# Altium PCB Copy of Main_Board.PcbDoc (part 2 of 4)
Units mil, origin at the board's own origin, x right, y up, seen from the top; angles counter-clockwise.
Board outline 5818.45 x 4760.12 mil, 4 copper layers (Top Layer, POWER, GROUND, Bottom Layer), stack 30.634 mil thick; 298 components, 323 nets, 1386 pads, 599 vias.
Unrouted connection lines stored in the file: 1.
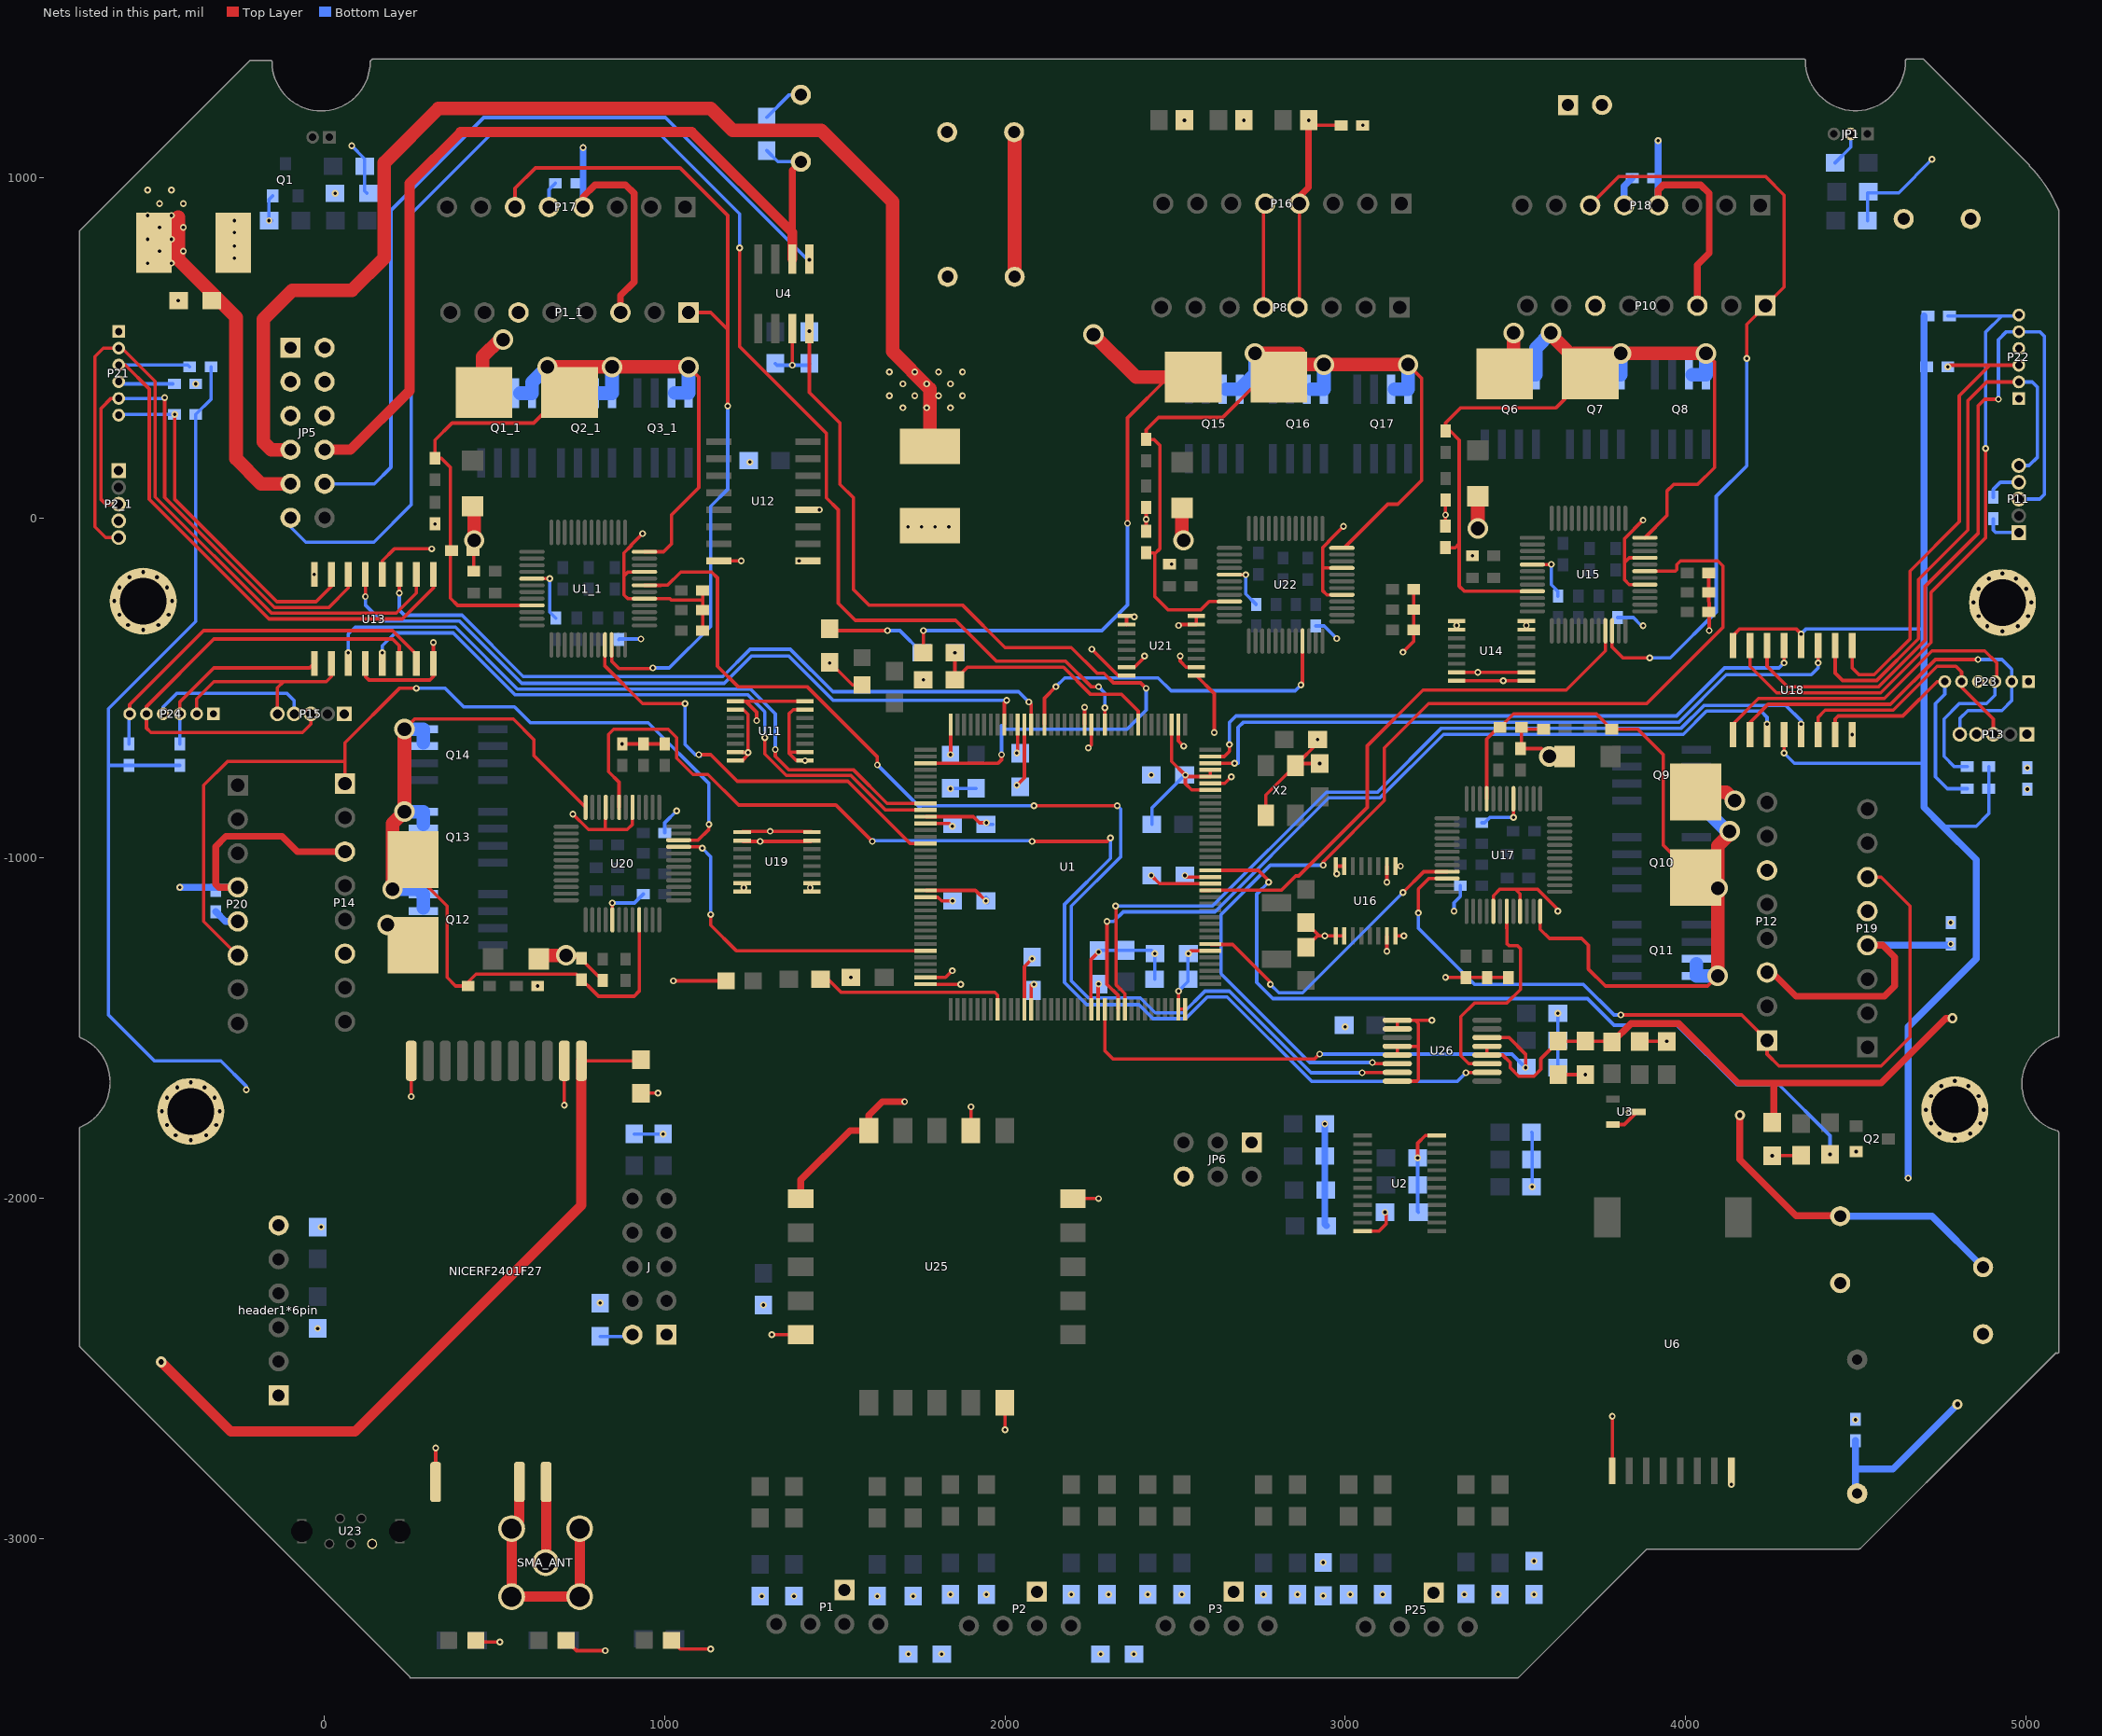
[diagram p4: the nets of this part, all layers, seen from the top]

## Via types
v1: diameter 20, hole 10, Top Layer to Bottom Layer, 507 vias
v2: diameter 25, hole 12, Top Layer to Bottom Layer, 48 vias
v3: diameter 60, hole 40, Top Layer to Bottom Layer, 40 vias
v4: diameter 30, hole 16, Top Layer to Bottom Layer, 3 vias
v5: diameter 32, hole 16, Top Layer to Bottom Layer, 1 vias

## Nets (pads, with @x,y where several pads share a name; then routed paths per layer and width w, separated by ;. In a path a pad name is that pad's centre, name@x,y a point inside that pad or via, vN(x,y) a via of type N, cw(c..) or ccw(c..) an arc to the next point about the centre after c; other vN are vias at no path point) (continued)
+3.3V: C9.2 C10.2 C41.1 C42.1 C43.1 C44.1 C45.1 C54.1 C55.1 C66.1 C67.1 C78.1 C79.1 C85.1 C91.1 C99.2 C103.1 C104.1 DS1.1 DS2.1 DS3.1 DS4.1 DS5.1 header1*6pin.1 J.2 JP5.7 JP6.1 R11.2 R12.2 R13.2 R14.2 R15.2 R16.2 R17.2 R18.2 R19.2 R20.2 R21.2 R22.2 R23.1 R24.1 R35.2 R40.2 R41.2 R42.2 R48.2 R49.2 R50.2 R51.2 R91.2 R92.1 R93.1 R98.1 R103.2 R104.2 R105.2 R106.2 R111.1 R112.1 R113.1 R114.1 R115.1 R116.1 R117.1 R118.1 R119.2 R120.2 R121.2 R122.2 R123.2 U1.6 U1.17 U1.30 U1.32 U1.33 U1.39 U1.52 U1.62 U1.72 U1.84 U1.95 U1.108 U1.121 U1.131 U1.143 U1.144 U2.24 U6.1 U11.1 U11.16 U12.4 U12.16 U13.4 U13.12 U13.16 U14.1 U14.16 U16.1 U16.16 U18.4 U18.12 U18.16 U19.1 U19.16 U21.1 U21.16 U25.1 U25.20 | length 15898.9
  Top Layer w10: U13.12@119.99,-428.38 119.99,-466.38 130.49,-476.88 309.49,-476.88 319.99,-466.38 U13.16@319.99,-444.38 ; U13.4@169.99,-166.38 169.99,-126.38 204.99,-91.38 v1(314.99,-91.38) ; U13.16@319.99,-428.38 v1(319.99,-366.38) ; DS3.1@444.99,-3300.08 449.99,-3305.08 v1(514.99,-3305.08) ; DS2.1@709.99,-3300.08 739.99,-3330.08 v1(824.99,-3330.08) ; DS5.1@1019.99,-3300.08 1044.99,-3325.08 v1(1134.99,-3325.08) ; v1(1024.99,-1361.38) DS4.1@1179.99,-1361.38 ; U12.16@1158.99,-126.38 v1(1224.99,-126.38) ; U11.1@1207.49,-538.88 1237.49,-538.88 ; U19.1@1227.49,-923.88 1229.99,-921.38 v1(1309.99,-921.38) 1429.99,-921.38 U19.16@1432.49,-923.88 ; v1(1269.99,-596.38) 1269.99,-571.38 1237.49,-538.88 ; U11.16@1412.49,-538.88 1237.49,-538.88 ; C79.1@1484.99,-424.38 1551.99,-491.38 DS1.1@1579.99,-491.38 ; U1.108@1766.68,-1370.87 1767.2,-1371.38 v1(1869.99,-1371.38) ; U1.95@1766.68,-1114.96 1802.36,-1114.96 1813.77,-1126.38 v1(1845.99,-1126.38) ; U1.84@1766.68,-898.43 1837.13,-898.43 v1(1845.09,-906.38) ; v1(1839.99,-696.38) 1840.5,-695.87 U1.72@1840.5,-608.08 ; v1(2034.99,-691.38) 2037.35,-689.02 U1.62@2037.35,-608.08 ; U1.121@2076.72,-1444.69 2076.72,-1373.65 2078.99,-1371.38 v1(2084.99,-1371.38) ; U1.52@2234.2,-608.08 v1(2234.2,-557.17) ; v1(2254.99,-386.38) 2332.49,-463.88 U21.16@2357.49,-463.88 ; U1.131@2273.57,-1444.69 2273.57,-1371.8 v1(2274.99,-1370.38) ; U1.39@2490.11,-608.08 2490.11,-681.26 2489.99,-681.38 2489.99,-716.38 v1(2529.99,-756.38) ; U1.143@2509.8,-1444.69 U1.144@2529.48,-1444.69 ; U1.143@2509.99,-1434.33 v1(2509.99,-1391.38) ; v1(2528.99,-1051.38) 2533.52,-1055.91 U1.17@2603.3,-1055.91 ; v1(2538.99,-1281.38) 2547.93,-1272.45 U1.6@2603.3,-1272.45 ; U21.1@2562.49,-463.88 2614.99,-516.38 v1(2614.99,-631.38) ; U1.30@2603.3,-800 2548.61,-800 2529.99,-781.38 v1(2529.99,-756.38) ; U1.33@2603.3,-740.95 U1.32@2603.3,-760.63 2534.24,-760.63 v1(2529.99,-756.38) ; U16.16@3147.49,-1228.88 v1(3172.49,-1228.88) ; U16.1@3147.49,-1023.88 v1(3162.49,-1023.88) ; v1(3212.99,-1881.38) 3212.99,-1838.38 3235.74,-1815.63 U2.24@3268.99,-1815.63 ; U14.16@3327.49,-478.88 v1(3464.99,-478.88) U14.1@3532.49,-478.88 ; U6.1@3784.99,-2801.38 v1(3784.99,-2641.38) ; U18.16@4139.99,-375.38 4139.99,-346.38 4159.99,-326.38 4324.99,-326.38 v1(4339.99,-341.38) ; v1(4289.99,-691.38) U18.4@4289.99,-637.38
  Top Layer w20: U25.1@1399.99,-2001.38 1399.99,-1946.38 1544.99,-1801.38 U25.20@1599.99,-1801.38 1599.99,-1756.38 1639.99,-1716.38 v1(1704.99,-1716.38)
  Top Layer w40: JP5.7@-100,200 -156.39,200 -180.01,223.62 -180.01,583.62 -95.01,668.62 79.99,668.62 174.99,763.62 174.99,1043.62 334.99,1203.62 1134.99,1203.62 1199.99,1138.62 1459.99,1138.62 1669.99,928.62 1669.99,488.62 1779.99,378.62 C103.1@1779.99,209.76
  Bottom Layer w10: R111.1@-425.01,-727.88 R112.1@-575.01,-727.88 -631.51,-727.88 -635.01,-731.38 ; R113.1@-333.51,443.62 -333.51,348.62 R114.1@-378.51,303.62 -378.51,-304.88 -635.01,-561.38 -635.01,-731.38 ; v1(-230.01,-1681.38) -230.01,-1671.38 -305.01,-1596.38 -500.01,-1596.38 -635.01,-1461.38 -635.01,-731.38 ; C10.2@809.99,-2406.38 899.99,-2406.38 J.2@904.99,-2401.38 J.2@905.99,-2402.38 ; R91.2@909.99,-1811.38 v1(994.99,-1811.38) ; R35.2@2431.99,-901.38 2431.99,-852.38 C78.1@2527.99,-756.38 ; v1(2509.99,-1391.38) 2537.99,-1363.38 C55.1@2537.99,-1356.38 2537.99,-1282.38 v1(2538.99,-1281.38) ; v1(3212.99,-1881.38) R24.1@3212.99,-1961.38 3212.99,-2039.38 C9.2@3214.99,-2041.38 ; R40.2@3547.99,-1806.38 3549.99,-1808.38 v1(3549.99,-1966.38) ; R50.2@3624.99,-1616.38 R48.2@3624.99,-1536.38 v1(3624.99,-1456.38) ; v1(4289.99,-691.38) 4319.99,-721.38 4701.49,-721.38 ; v1(4339.99,-341.38) 4354.99,-326.38 4696.49,-326.38 4701.49,-331.38 ; 4756.49,-906.38 4854.99,-906.38 4891.49,-869.88 R118.1@4891.49,-796.38 R117.1@4891.49,-731.38
  Bottom Layer w20: v1(2939.99,-1781.38) R120.2@2939.99,-1876.38 2939.99,-2076.38 R123.2@2944.99,-2081.38 ; v1(4654.99,-1941.38) 4654.99,-1496.38 4854.99,-1296.38 4854.99,-1004.88 4756.49,-906.38 4701.49,-851.38 4701.49,-721.38 4701.49,-331.38 R116.1@4701.49,593.62
  other v1: 1813.99,-3340.08 2378.99,-3340.08 1284.99,-3170.08 1379.99,-3170.08 1624.99,-3170.08 1729.99,-3170.08 2934.99,-3169.08 1839.99,-3165.08 1944.99,-3165.08 2194.99,-3165.08 2304.99,-3165.08 2419.99,-3165.08 2519.99,-3165.08 2759.99,-3165.08 2859.99,-3165.08 3014.99,-3165.08 3109.99,-3165.08 3349.99,-3165.08 3449.99,-3165.08 3554.99,-3165.08 1289.99,-2314.38 -10,-2085 2999.99,-1496.38 1484.99,-426.38 1454.99,23.62 1249.99,163.62 1699.99,323.62 1769.99,323.62 1839.99,323.62 1659.99,358.62 1734.99,358.62 1804.99,358.62 1874.99,358.62 1699.99,393.62 1769.99,393.62 1839.99,393.62 1659.99,428.62 1734.99,428.62 1804.99,428.62 1874.99,428.62
+5V: C2.2 C3.2 C8.1 C11_1.2 C12_1.2 C17.2 C18.2 C56.2 C57.2 C68.2 C69.2 C80.2 C81.2 C93.2 C110.1 C111.1 J10.1 JP5.9 LS1.1 NICERF2401F27.1 P1_1.3 P2_1.4 P8.4 P10.3 P11.4 P12.3 P13.4 P14.3 P15.4 P16.4 P17.4 P18.4 P19.4 P20.4 P21.4 P22.4 P23.4 P24.4 R1.1 R4.2 R5.2 R43.2 R86.1 R87.1 R88.1 U26.12 U26.13 | length 10453.8
  Top Layer w10: NICERF2401F27.1@754.99,-1596.38 926.99,-1596.38 C8.1@929.99,-1593.38 ; P8.4@2859.99,618.62 2864.99,623.62 P16.4@2864.99,923.62 P16.4@2864.99,943.62 ; v1(2892.39,1168.62) 2907.39,1153.62 C56.2@2988.49,1153.62 ; U26.13@3416.88,-1553.59 U26.12@3416.88,-1579.18 3462.79,-1579.18 3484.99,-1601.38 3484.99,-1616.38 3509.99,-1641.38 3554.99,-1641.38 3574.99,-1621.38 3574.99,-1590.5 C17.2@3626.79,-1538.7 C18.2@3706.29,-1538.7 3781.61,-1538.7 R43.2@3784.3,-1541.38
  Top Layer w20: P20.4@-255.01,-1086.38 -310.01,-1086.38 -320.01,-1076.38 -320.01,-966.38 -290.01,-936.38 -125.01,-936.38 -80.01,-981.38 P14.3@59.99,-981.38 ; P17.4@759.99,913.62 759.99,943.62 794.99,978.62 884.99,978.62 909.99,953.62 909.99,693.62 869.99,653.62 P1_1.3@869.99,603.62 ; P16.4@2864.99,943.62 2892.39,971.02 v1(2892.39,1168.62) ; R43.2@3784.3,-1541.38 3784.99,-1541.38 3839.99,-1486.38 3979.99,-1486.38 4154.99,-1661.38 4259.99,-1661.38 ; P18.4@3919.99,918.62 3919.99,963.62 3934.99,978.62 4044.99,978.62 4069.99,953.62 4069.99,778.62 4034.99,743.62 P10.3@4034.99,623.62 ; P12.3@4239.99,-1336.38 4254.99,-1336.38 4324.99,-1406.38 4584.99,-1406.38 4614.99,-1376.38 4614.99,-1291.38 4579.99,-1256.38 P19.4@4534.99,-1256.38 ; C3.2@4259.99,-1777.38 4259.99,-1661.38 ; v4(4784.99,-1471.38) 4764.99,-1471.38 4574.99,-1661.38 4259.99,-1661.38
  Top Layer w30: v5(-480.01,-2481.38) -275.01,-2686.38 89.99,-2686.38 754.99,-2021.38 NICERF2401F27.1@754.99,-1596.38
  Top Layer w40: -430.01,883.62 -430.01,758.62 -260.01,588.62 -260.01,173.62 -186.39,100 JP5.9@-100,100
  Bottom Layer w10: P21.4@-605.01,400.19 -598.43,393.62 C68.2@-446.51,393.62 ; P24.4@-474.22,-576.38 -474.22,-555.59 -435.01,-516.38 -110.01,-516.38 -89.22,-537.17 P15.4@-89.22,-576.38 ; v1(79.99,1093.62) 117.99,1055.62 R5.2@117.99,1033.62 117.99,960.62 C2.2@124.99,953.62 ; R1.1@4534.99,873.62 4534.99,955.62 4626.99,955.62 v1(4724.99,1053.62) ; C81.2@4904.99,60.12 4904.99,83.62 4925.78,104.41 P11.4@4979.99,104.41
  Bottom Layer w20: v1(-425.01,-1086.38) P20.4@-255.01,-1086.38 ; P17.4@759.99,913.62 v1(759.99,1088.62) ; P18.4@3919.99,918.62 v1(3919.99,1108.62) ; C93.2@4499.99,-2712.88 4499.99,-2796.38 ; LS1.1@4504.99,-2868.23 4499.99,-2863.23 4499.99,-2796.38 ; P19.4@4534.99,-1256.38 4776.49,-1256.38 v1(4779.99,-1252.88) ; v4(4799.99,-2606.38) 4609.99,-2796.38 4499.99,-2796.38
  other v1: 5004.99,-797.88 -520.01,748.62 -450.01,748.62 -485.01,783.62 -415.01,783.62 -520.01,818.62 -450.01,818.62 -485.01,853.62 -415.01,853.62 -520.01,888.62 -450.01,888.62 -485.01,923.62 -415.01,923.62 -520.01,963.62 -450.01,963.62 2527.39,1168.62 2702.39,1168.62
+12V: C16.1 C112.1 JP5.8 U4.6 | length 2651
  Top Layer w20: 1374.99,838.62 1374.99,1021.77 C112.1@1399.99,1046.77
  Top Layer w30: JP5.8@0,200 76.37,200 249.99,373.62 249.99,983.62 399.99,1133.62 1079.99,1133.62 1374.99,838.62 U4.6@1374.99,760.98
  Bottom Layer w10: C16.1@1299.99,1079.62 1332.84,1046.77 C112.1@1399.99,1046.77
+16V: C38.1 C92.1 C107.1 C108.1 C109.1 F1_1.1 F3.1 F4.1 F5.1 F6.1 JP5.2 JP5.4 JP5.6 R44.2 | length 3599.7
  Top Layer w10: R44.2@1759.99,-396.38 v1(1759.99,-331.38) ; v1(2359.99,-16.38) 2359.99,293.62 F6.1@2479.99,413.62
  Top Layer w20: v4(4159.99,-1756.38) 4159.99,-1886.38 4324.99,-2051.38 C108.1@4464.99,-2051.38
  Top Layer w40: F1_1.1@474.99,393.62 464.99,403.62 464.99,473.62 514.99,523.62 v3(524.99,523.62) ; C38.1@2026.84,1133.62 2028.42,1132.04 C107.1@2028.42,708.62 ; v3(2259.99,538.62) 2384.99,413.62 2479.99,413.62 F6.1@2534.99,413.62 ; F6.1@2539.99,465.12 F6.1@2564.99,465.12 ; F3.1@3468.81,423.62 3494.99,449.8 v3(3494.99,543.62) ; F4.1@4029.99,-806.38 4119.99,-806.38 v3(4144.99,-831.38)
  Bottom Layer w10: v1(1759.99,-331.38) 2284.99,-331.38 2359.99,-256.38 v1(2359.99,-16.38)
  Bottom Layer w20: C108.1@4454.99,-2052.96 4724.99,-2052.96 C92.1@4874.99,-2202.96
  other v3: 184.99,-1196.38
+16V_1: C9_1.2 F1_1.2 LED1.1 Q1_1.7 Q1_1.8 Q2_1.7 Q2_1.8 Q3_1.7 Q3_1.8 U1_1.24 U1_1.45 | length 2632.7
  Top Layer w10: U1_1.45@609.64,-257.48 391.09,-257.48 369.99,-236.38 369.99,148.62 343.49,175.12 LED1.1@324.99,175.12 324.99,228.62 374.99,278.62 614.99,278.62 704.99,368.62 F1_1.2@719.99,368.62 ; v3@836.49,435.12 v3(844.99,443.62) ; U1_1.24@940.35,-100 996.37,-100 1019.99,-76.38 1019.99,8.62 1099.99,88.62 1099.99,413.62 v3(1069.99,443.62)
  Top Layer w40: v3(654.99,443.62) v3(844.99,443.62) v3(1069.99,443.62)
  Bottom Layer w40: 574.99,366.45 Q1_1.8@609.99,366.45 609.99,398.62 v3(654.99,443.62) ; Q2_1.7@804.99,366.45 Q2_1.8@844.99,366.45 v3@844.99,438.62 ; Q3_1.7@1029.99,366.73 Q3_1.8@1069.99,366.73 v3@1069.99,438.62
+16V_2: C53.2 F3.2 LED2.1 Q6.7 Q6.8 Q7.7 Q7.8 Q8.7 Q8.8 U15.24 U15.45 | length 2912.1
  Top Layer w10: C53.2@3294.99,-87.88 3323.49,-87.88 3334.99,-76.38 ; U15.45@3550.11,-216.07 3349.99,-216.07 3334.99,-201.07 3334.99,-76.38 ; F3.2@3674.52,483.15 3674.52,469.09 3674.52,378.15 3619.99,323.62 3339.99,323.62 3295.46,279.09 LED2.1@3295.46,255.59 3308.02,255.59 3334.99,228.62 3334.99,-76.38 ; U15.24@3880.82,-58.59 3945.46,6.06 3945.46,78.15 3965.46,98.15 4035.82,98.15 4085.46,147.79 4085.46,458.15 v3(4060.46,483.15)
  Top Layer w40: v3(3604.99,543.62) 3604.99,538.62 3674.52,469.09 F3.2@3719.99,423.62 ; F3.2@3674.52,483.15 v3(3810.46,483.15) v3(4060.46,483.15)
  Bottom Layer w40: Q6.7@3520.46,420.98 Q6.8@3560.46,420.98 3560.46,499.09 v3(3604.99,543.62) ; Q7.7@3770.46,420.98 Q7.8@3810.46,420.98 v3(3810.46,483.15) ; Q8.7@4020.46,420.98 Q8.8@4060.46,420.98 v3(4060.46,483.15)
+16V_3: C65.2 F4.2 LED3.1 Q9.7 Q9.8 Q10.7 Q10.8 Q11.7 Q11.8 U17.24 U17.45 | length 2730.8
  Top Layer w10: U17.45@3415.78,-826.03 3415.78,-650.59 3449.99,-616.38 C65.2@3454.99,-616.38 3494.99,-576.38 3737.99,-576.38 LED3.1@3782.99,-621.38 3859.99,-621.38 3934.99,-696.38 3934.99,-962.56 3997.99,-1025.56 F4.2@3997.99,-1026.38 ; U17.24@3573.26,-1156.74 3573.26,-1209.65 3599.99,-1236.38 3694.99,-1236.38 3714.99,-1256.38 3714.99,-1326.74 3764.64,-1376.38 4064.99,-1376.38 v3(4094.99,-1346.38) ; F4.2@4014.99,-1089.38 4015.49,-1088.88 v3(4094.99,-1088.88)
  Top Layer w40: v3(4094.99,-1346.38) v3(4094.99,-1088.88) 4094.99,-963.88 4137.49,-921.38 v3(4129.99,-921.38)
  Bottom Layer w40: 4032.59,-1311.38 Q11.8@4032.59,-1346.38 v3(4094.99,-1346.38) ; 4032.59,-1051.38 Q10.8@4032.59,-1088.88 v3(4094.99,-1088.88) ; Q9.7@4032.59,-791.38 Q9.8@4032.59,-831.38 4122.59,-921.38 v3(4129.99,-921.38)
+16V_4: C77.2 F5.2 LED4.1 Q12.7 Q12.8 Q13.7 Q13.8 Q14.7 Q14.8 U20.24 U20.45 | length 2721.3
  Top Layer w10: v3(234.99,-621.38) 264.99,-591.38 554.99,-591.38 614.99,-651.38 614.99,-698.67 U20.24@767.35,-851.03 ; F5.2@244.99,-1006.38 244.99,-1026.38 359.99,-1141.38 359.99,-1351.38 384.99,-1376.38 LED4.1@421.99,-1376.38 421.99,-1364.38 444.99,-1341.38 739.99,-1341.38 804.99,-1406.38 909.99,-1406.38 924.83,-1391.54 U20.45@924.83,-1181.74
  Top Layer w40: v3(199.99,-1091.38) 199.99,-898.88 v3(234.99,-863.88) v3(234.99,-621.38)
  Bottom Layer w40: v3(199.99,-1091.38) 275.27,-1091.38 Q12.8@290.27,-1106.38 Q12.7@290.27,-1146.38 ; v3(234.99,-863.88) Q13.8@290.27,-863.88 290.02,-901.38 ; v3(234.99,-621.38) Q14.8@290.27,-621.38 Q14.7@290.27,-661.38
+16V_d: C90.2 F6.2 LED5.1 Q15.7 Q15.8 Q16.7 Q16.8 Q17.7 Q17.8 U22.24 U22.45 | length 2861.9
  Top Layer w10: C90.2@2414.99,-102.88 2436.49,-102.88 2439.99,-106.38 ; U22.45@2659.64,-245.98 2600.39,-245.98 2575.49,-270.88 2479.49,-270.88 2439.99,-231.38 2439.99,-106.38 ; v3(2734.99,483.62) 2734.99,390.12 2639.99,295.12 2451.49,295.12 2414.99,258.62 LED5.1@2414.99,230.12 2438.49,230.12 2454.99,213.62 2454.99,-91.38 2439.99,-106.38 ; v3@2927.99,440.62 v3(2937.49,450.12) ; U22.24@2990.35,-87.28 2997.59,-87.28 3124.99,40.12 3154.99,40.12 3224.99,110.12 3224.99,410.12 v3(3184.99,450.12)
  Top Layer w40: v3(2734.99,483.62) 2863.99,483.62 2834.49,454.12 2838.49,450.12 v3(2937.49,450.12) v3(3184.99,450.12)
  Bottom Layer w40: Q15.7@2649.99,378.23 Q15.8@2689.99,378.23 2734.99,423.23 v3(2734.99,483.62) ; 2899.99,378.23 Q16.8@2937.49,378.23 v3(2937.49,450.12) ; Q17.7@3144.99,378.23 Q17.8@3184.99,378.23 v3(3184.99,450.12)
ADC_BATTERY: C13.2 R44.1 R45.2 U1.44 | length 727.3
  Top Layer w10: v1(1852.99,-396.38) R45.2@1852.99,-476.38 1889.99,-439.38 2172.03,-439.38 2251.77,-519.11 2342.75,-519.11 2391.68,-568.05 U1.44@2391.68,-608.08
ADC_CAP: JP5.11 U1.49 | length 4707
  Top Layer w10: v1(1219.99,793.62) 1219.99,503.62 1474.99,248.62 1474.99,58.62 1509.99,23.62 1509.99,-251.38 1559.99,-301.38 1854.99,-301.38 1974.99,-421.38 2178.08,-421.38 2253.08,-496.38 v1(2274.99,-496.38) ; U1.49@2293.26,-608.08 v1(2293.26,-558.11)
  Bottom Layer w10: JP5.11@-100,0 -100,-26.39 -55.01,-71.38 144.99,-71.38 254.99,38.62 254.99,893.62 484.99,1123.62 989.99,1123.62 1219.99,893.62 v1(1219.99,793.62) ; v1(2274.99,-496.38) 2293.26,-514.65 v1(2293.26,-558.11)
ANT: NICERF2401F27.12 SMA_ANT.1 | length 237.8
  Top Layer w30: SMA_ANT.1@649.99,-3071.38 651.45,-3069.93 NICERF2401F27.12@651.45,-2834.18
ANT_GND: NICERF2401F27.13 SMA_ANT.2 | length 746.6
  Top Layer w30: NICERF2401F27.13@572.71,-2834.18 572.71,-2948.67 SMA_ANT.2@549.99,-2971.38 SMA_ANT.2@549.99,-3171.38 SMA_ANT.2@749.99,-3171.38 SMA_ANT.2@749.99,-2971.38
BOOT_DONE: R102.1 U1.116 | length 581.3
  Top Layer w10: R102.1@1457.99,-1356.38 1479.99,-1356.38 1518.3,-1394.69 1969.99,-1394.69 1978.3,-1403 U1.116@1978.3,-1444.69
Buzzer: R6.1 U1.18 | length 2432.1
  Top Layer w10: U1.18@2603.3,-1036.22 2744.83,-1036.22 2779.99,-1071.38 v1(2774.99,-1071.38)
  Bottom Layer w10: v1(2774.99,-1071.38) 2739.99,-1106.38 2739.99,-1366.38 2786.99,-1413.38 3711.99,-1413.38 3789.99,-1491.38 3974.99,-1491.38 4149.99,-1666.38 4274.99,-1666.38 4424.99,-1816.38 v1(4424.99,-1871.38)
Chip: R47.2 U1.75 U4.4 | length 2645.4
  Top Layer w10: U4.4@1424.99,556.26 1424.99,368.62 1514.99,278.62 1514.99,98.62 1554.99,58.62 1554.99,-211.38 1599.99,-256.38 1874.99,-256.38 1999.99,-381.38 2194.99,-381.38 2270.99,-457.38 2291.15,-457.38 2318.88,-485.11 2398.72,-485.11 v1(2414.99,-501.38) ; U1.75@1766.68,-721.26 1980.11,-721.26 1989.99,-711.38 v1(1989.99,-696.38)
  Bottom Layer w10: v1(1989.99,-696.38) 1989.99,-611.38 1999.99,-621.38 2359.03,-621.38 2414.99,-565.42 v1(2414.99,-501.38)
  other v1: 1424.99,548.62
Chip_V: JP5.10 U4.5 | length 2486.4
  Bottom Layer w10: JP5.10@0,100 146.37,100 194.99,148.62 194.99,903.62 467.99,1176.62 1001.99,1176.62 1419.99,758.62 v1(1424.99,758.62)
CSOUT_1: U1_1.19 U26.7 | length 3563.1
  Top Layer w10: U1_1.19@940.35,-198.43 987.94,-198.43 ; 987.94,-198.11 1008.26,-198.11 1047,-159.37 1137.98,-159.37 1154.99,-176.38 1154.99,-436.38 1214.99,-496.38 1418.46,-496.38 1624.99,-702.91 v1(1624.99,-726.38) ; v1(2084.99,-846.38) v1(2329.99,-846.38) ; v1(3049.99,-1631.38) 3051.02,-1630.36 U26.7@3153.1,-1630.36
  Bottom Layer w10: v1(1624.99,-726.38) 1749.99,-851.38 1754.99,-846.38 v1(2084.99,-846.38) ; v1(2329.99,-846.38) 2339.99,-856.38 2339.99,-996.38 2194.99,-1141.38 2194.99,-1361.38 2244.99,-1411.38 2398.08,-1411.38 2442.08,-1455.38 2523.87,-1455.38 2587.87,-1391.38 2659.99,-1391.38 2899.99,-1631.38 v1(3049.99,-1631.38)
CSOUT_2: U15.19 U26.6 | length 3160.8
  Top Layer w10: v1(2934.99,-1021.38) 2934.99,-1011.38 3114.99,-831.38 3114.99,-676.38 3244.99,-546.38 3886.1,-546.38 4110.46,-322.02 4110.46,-141.85 4095.46,-126.85 3985.46,-126.85 3974.46,-137.85 3974.46,-152.85 3970.31,-157.01 U15.19@3880.82,-157.01 ; v1(3079.99,-1601.38) 3083.38,-1604.77 U26.6@3153.1,-1604.77
  Bottom Layer w10: v1(2934.99,-1021.38) 2779.99,-1021.38 2634.99,-1166.38 2634.99,-1340.42 2895.95,-1601.38 v1(3079.99,-1601.38)
CSOUT_3: U17.19 U26.11 | length 670.5
  Top Layer w10: U26.11@3416.88,-1604.77 3363.38,-1604.77 3339.99,-1581.38 3339.99,-1466.38 3379.99,-1426.38 3474.99,-1426.38 3514.99,-1386.38 3514.99,-1266.38 3505.99,-1257.38 3480.99,-1257.38 3475.15,-1251.54 3475.15,-1206.22 ; 3474.83,-1206.22 U17.19@3474.83,-1156.74
CSOUT_4: U20.19 U26.10 | length 3797.2
  Top Layer w10: U20.19@865.78,-851.03 865.78,-777.17 834.99,-746.38 834.99,-636.38 849.99,-621.38 1009.99,-621.38 1034.99,-646.38 1034.99,-706.38 1082.99,-754.38 1127.03,-754.38 1217.03,-844.38 1502.99,-844.38 v1(1609.99,-951.38) ; v1(2079.99,-951.38) 2299.99,-951.38 v1(2309.99,-941.38) ; v1(3354.99,-1631.38) 3356.02,-1630.36 U26.10@3416.88,-1630.36
  Bottom Layer w10: v1(1609.99,-951.38) v1@1611.99,-949.38 ; v1@1614.99,-946.38 v1@1611.99,-949.38 ; v1(2079.99,-951.38) 2077.99,-949.38 v1@1611.99,-949.38 ; v1(2309.99,-941.38) 2309.99,-1001.38 2174.99,-1136.38 2174.99,-1366.38 2239.99,-1431.38 2394.03,-1431.38 2435.03,-1472.38 2530.91,-1472.38 2594.91,-1408.38 2652.95,-1408.38 2900.95,-1656.38 3329.99,-1656.38 v1(3354.99,-1631.38)
CURRENT_DRDY: R50.1 U1.132 U26.14 | length 1564.8
  Top Layer w10: U1.132@2293.26,-1444.69 2293.26,-1566.57 2318.08,-1591.38 2602.27,-1591.38 2602.48,-1591.17 2910.2,-1591.17 v1(2924.99,-1576.38) ; U26.14@3416.88,-1528 3481.61,-1528 3529.99,-1576.38 v1(3529.99,-1616.38)
  Bottom Layer w10: v1(2924.99,-1576.38) 3489.99,-1576.38 v1(3529.99,-1616.38)
DIR_1: U1.87 U1_1.9 | length 1297.3
  Top Layer w10: U1_1.9@824.2,-373.63 824.2,-435.59 934.99,-546.38 v1(1059.99,-546.38) ; v1(1099.99,-696.38) 1134.99,-696.38 1212.99,-774.38 1537.99,-774.38 1721.09,-957.48 U1.87@1766.68,-957.48
  Bottom Layer w10: v1(1059.99,-546.38) 1059.99,-666.38 1089.99,-696.38 v1(1099.99,-696.38) v1@1104.49,-700.88
DIR_2: U1.15 U15.9 | length 1642.9
  Top Layer w10: U1.15@2578.3,-1095.28 U1.15@2603.3,-1095.28 2604.38,-1094.19 2813.06,-1094.19 2854.43,-1052.82 2863.55,-1052.82 3064.99,-851.38 3064.99,-670.42 3229.03,-506.38 3649.36,-506.38 3764.68,-391.07 U15.9@3764.68,-332.21
DIR_3: U1.7 U17.9 | length 907
  Top Layer w10: U1.7@2603.3,-1252.76 2605.08,-1254.54 2669.6,-1254.54 2779.99,-1364.93 v1(2779.99,-1371.38) ; v1(3169.99,-1101.38) 3230.78,-1040.59 U17.9@3299.64,-1040.59
  Bottom Layer w10: v1(2779.99,-1371.38) 2804.99,-1396.38 2874.99,-1396.38 v1(3169.99,-1101.38)
DIR_4: U1.103 U20.9 | length 969.9
  Top Layer w10: U20.9@1040.98,-967.17 1105.78,-967.17 v1(1109.99,-971.38) ; v1(1134.99,-1166.38) 1134.99,-1197.45 1209.99,-1272.45 U1.103@1766.68,-1272.45
  Bottom Layer w10: v1(1109.99,-971.38) 1134.99,-996.38 v1(1134.99,-1166.38)
DIR_d: U1.58 U22.9 | length 1010.3
  Top Layer w10: U1.58@2116.09,-608.08 2116.09,-530.28 v1(2149.99,-496.38) ; v1(2869.99,-491.38) 2874.2,-487.17 U22.9@2874.2,-362.13
  Bottom Layer w10: v1(2149.99,-496.38) 2175.99,-470.38 2449.99,-470.38 2487.99,-508.38 2852.99,-508.38 v1(2869.99,-491.38)
Encoder_A_1: U1.60 U13.3 | length 2205.3
  Top Layer w10: v1(219.99,-221.38) U13.3@219.99,-165.38 ; v1@2071.72,-541.38 v1(2069.99,-541.38) 2076.72,-548.11 U1.60@2076.72,-608.08
  Bottom Layer w10: v1(219.99,-221.38) 219.99,-271.38 234.99,-286.38 404.03,-286.38 584.03,-466.38 1170.95,-466.38 1250.95,-386.38 1369.03,-386.38 1494.03,-511.38 2039.99,-511.38 v1(2069.99,-541.38)
Encoder_A_1+: P2_1.5 P21.2 U13.2 | length 2140.8
  Top Layer w10: P2_1.5@-605.01,-58.23 -643.16,-58.23 -675.01,-26.38 -675.01,473.62 -650.01,498.62 P21.2@-605.01,498.62 -595.01,498.62 -498.01,401.62 -498.01,61.62 -156.01,-280.38 210.99,-280.38 269.99,-221.38 U13.2@269.99,-165.38
Encoder_A_1-: P21.3 R113.2 U13.1 | length 1714
  Top Layer w10: P21.3@-605.01,449.41 -585.8,449.41 -515.01,378.62 -515.01,54.2 -163.42,-297.38 228.99,-297.38 319.99,-206.38 U13.1@319.99,-165.38
  Bottom Layer w10: P21.3@-605.01,449.41 -402.3,449.41 R113.2@-396.51,443.62
Encoder_A_2: U1.34 U18.11 | length 2020.2
  Top Layer w10: U1.34@2603.3,-721.26 2603.42,-721.38 v1(2674.99,-721.38) ; v1(4389.99,-426.38) U18.11@4389.99,-385.38
  Bottom Layer w10: v1(2674.99,-721.38) 2684.99,-721.38 2684.99,-616.38 2699.99,-601.38 3979.99,-601.38 4119.99,-461.38 4369.99,-461.38 4389.99,-441.38 v1(4389.99,-426.38)
Encoder_A_2+: P11.5 P22.2 U18.10 | length 1640.6
  Top Layer w10: U18.10@4439.99,-385.38 4439.99,-456.38 4461.99,-478.38 4562.03,-478.38 4684.99,-355.42 4684.99,-181.38 4829.99,-36.38 4829.99,344.41 4884.99,399.41 P22.2@4979.99,399.41
  Bottom Layer w10: P11.5@4979.99,153.62 5009.99,153.62 5034.99,178.62 5034.99,383.62 5019.2,399.41 P22.2@4979.99,399.41
Encoder_A_2-: P22.3 R115.2 U18.9 | length 1390.7
  Top Layer w10: U18.9@4489.99,-385.38 4489.99,-441.38 4509.99,-461.38 4554.99,-461.38 4659.99,-356.38 4659.99,-156.38 4804.99,-11.38 4804.99,358.62 4894.99,448.62 ; v1(4771.49,443.62) 4776.49,448.62 4894.99,448.62 ; P22.3@4979.99,448.62 4894.99,448.62
Encoder_A_3: U1.134 U18.3 | length 2536.3
  Top Layer w10: v1(2299.99,-1186.38) 2299.99,-1371.38 2332.63,-1404.02 U1.134@2332.63,-1444.69 ; U18.3@4239.99,-647.38 v1(4239.99,-606.38)
  Bottom Layer w10: v1(2299.99,-1186.38) 2319.99,-1186.38 2347.99,-1158.38 2617.03,-1158.38 2952.03,-823.38 3102.03,-823.38 3289.03,-636.38 3994.03,-636.38 4062.03,-568.38 4221.99,-568.38 4239.99,-586.38 v1(4239.99,-606.38)
Encoder_A_3+: P13.5 P23.2 U18.2 | length 1216.5
  Top Layer w10: U18.2@4189.99,-647.38 4189.99,-601.38 4242.99,-548.38 4602.99,-548.38 4734.99,-416.38 v1(4859.99,-416.38)
  Bottom Layer w10: P13.5@4806.57,-636.38 4806.57,-589.81 4829.99,-566.38 4929.99,-566.38 4959.2,-537.17 P23.2@4959.2,-481.38 4959.2,-445.59 4929.99,-416.38 v1(4859.99,-416.38)
Encoder_A_3-: P23.3 R117.2 U18.1 | length 1386.5
  Top Layer w10: U18.1@4139.99,-647.38 4139.99,-606.38 4214.99,-531.38 4584.99,-531.38 4724.99,-391.38 4879.99,-391.38 4914.99,-426.38 4914.99,-476.38 P23.3@4909.99,-481.38
  Bottom Layer w10: R117.2@4828.49,-731.38 4789.99,-731.38 4759.99,-701.38 4759.99,-591.38 4804.99,-546.38 4884.99,-546.38 4909.99,-521.38 P23.3@4909.99,-481.38
Encoder_A_4: U1.81 U13.11 | length 2078.8
  Top Layer w10: U13.11@69.99,-427.38 v1(69.99,-396.38) ; v1(1324.99,-681.38) 1324.99,-701.38 1363.99,-740.38 1553.99,-740.38 1652.98,-839.37 U1.81@1766.68,-839.37
  Bottom Layer w10: v1(69.99,-396.38) 69.99,-341.38 89.99,-321.38 384.99,-321.38 566.99,-503.38 1251.99,-503.38 1324.99,-576.38 v1(1324.99,-681.38)
Encoder_A_4+: P15.5 P24.2 U13.10 | length 608.9
  Top Layer w10: P24.2@-375.8,-576.38 -375.8,-532.17 -325.01,-481.38 -120.01,-481.38 ; P15.5@-138.43,-576.38 -138.43,-499.81 -120.01,-481.38 ; U13.10@19.99,-427.38 19.99,-466.38 4.99,-481.38 -120.01,-481.38
Encoder_A_4-: P24.3 R111.2 U13.9 | length 565.7
  Top Layer w10: P24.3@-425.01,-576.38 -425.01,-541.38 -325.01,-441.38 -44.01,-441.38 U13.9@-30.01,-427.38
  Bottom Layer w10: R111.2@-425.01,-664.88 P24.3@-425.01,-576.38
Encoder_B_1: U1.64 U13.5 | length 2232.8
  Top Layer w10: v1(119.99,-231.38) U13.5@119.99,-165.38 ; U1.64@1997.98,-608.08 1997.98,-543.39 v1(2004.99,-536.38)
  Bottom Layer w10: v1(119.99,-231.38) 119.99,-256.38 166.99,-303.38 396.99,-303.38 579.99,-486.38 1174.99,-486.38 1254.99,-406.38 1364.99,-406.38 1494.99,-536.38 v1(2004.99,-536.38)
Encoder_B_1+: P2_1.3 P21.5 U13.6 | length 1557.6
  Top Layer w10: P2_1.3@-605.01,40.19 -643.16,40.19 -656.58,53.62 -656.58,322.04 -627.65,350.98 P21.5@-605.01,350.98 ; v1(-470.01,353.62) -470.01,59.58 -147.05,-263.38 12.99,-263.38 69.99,-206.38 U13.6@69.99,-165.38
  Bottom Layer w10: P21.5@-605.01,350.98 -472.65,350.98 v1(-470.01,353.62)
Encoder_B_1-: P21.6 R114.2 U13.7 | length 1054.7
  Top Layer w10: v1(-440.01,303.62) -440.01,53.62 -140.01,-246.38 -25.01,-246.38 19.99,-201.38 U13.7@19.99,-165.38
  Bottom Layer w10: P21.6@-605.01,301.77 -603.16,303.62 R114.2@-441.51,303.62 v1(-440.01,303.62)
Encoder_B_2: U1.35 U18.13 | length 1891.5
  Top Layer w10: U1.35@2603.3,-701.58 2644.8,-701.58 2659.99,-686.38 v1(2659.99,-666.38) ; v1(4289.99,-426.38) U18.13@4289.99,-385.38
  Bottom Layer w10: v1(2659.99,-666.38) 2659.99,-601.38 2678.99,-582.38 3973.99,-582.38 4114.99,-441.38 4274.99,-441.38 v1(4289.99,-426.38)
Encoder_B_2+: P11.3 P22.5 U18.14 | length 2289
  Top Layer w10: U18.14@4239.99,-385.38 4239.99,-436.38 4299.99,-496.38 4568.08,-496.38 4704.99,-359.47 4704.99,-201.38 4859.99,-46.38 4859.99,328.62 4879.99,348.62 v1(4919.99,348.62)
  Bottom Layer w10: v1(4919.99,348.62) 4919.99,523.62 4943.42,547.04 P22.5@4979.99,547.04 5041.57,547.04 5054.99,533.62 5054.99,68.62 5041.57,55.19 P11.3@4979.99,55.19
Encoder_B_2-: P22.6 R116.2 U18.15 | length 1932.4
  Top Layer w10: U18.15@4189.99,-385.38 4189.99,-436.38 4267.99,-514.38 4574.12,-514.38 4721.99,-366.51 4721.99,-219.38 4882.49,-58.88 v1(4882.49,203.62)
  Bottom Layer w10: R116.2@4771.49,593.62 4929.99,593.62 ; v1(4882.49,203.62) 4882.49,546.12 4929.99,593.62 ; P22.6@4979.99,596.26 4977.35,593.62 4929.99,593.62
Encoder_B_3: U1.135 U18.5 | length 2643.6
  Top Layer w10: v1(2324.99,-1141.38) 2326.99,-1143.38 2326.99,-1373.38 2352.31,-1398.71 U1.135@2352.31,-1444.69 ; U18.5@4339.99,-647.38 v1(4339.99,-606.38)
  Bottom Layer w10: v1(2324.99,-1141.38) 2609.99,-1141.38 2944.99,-806.38 3094.99,-806.38 3282.99,-618.38 3987.99,-618.38 4054.99,-551.38 4294.99,-551.38 4339.99,-596.38 v1(4339.99,-606.38)
Encoder_B_3+: P13.3 P23.5 U18.6 | length 773.7
  Top Layer w10: U18.6@4389.99,-647.38 4389.99,-586.38 4410.99,-565.38 4610.99,-565.38 4739.99,-436.38 4794.99,-436.38 4811.57,-452.96 P23.5@4811.57,-481.38 4811.57,-497.96 4904.99,-591.38 P13.3@4904.99,-636.38
Encoder_B_3-: P23.6 R118.2 U18.7 | length 823.3
  Top Layer w10: U18.7@4439.99,-647.38 4439.99,-591.38 4448.99,-582.38 4638.99,-582.38 4739.99,-481.38 P23.6@4762.35,-481.38
  Bottom Layer w10: P23.6@4762.35,-481.38 4762.35,-519.02 4734.99,-546.38 4734.99,-761.38 4769.99,-796.38 R118.2@4828.49,-796.38
Encoder_B_4: U1.82 U13.13 | length 1951.8
  Top Layer w10: U13.13@169.99,-427.38 v1(169.99,-396.38) ; v1(1294.03,-646.38) 1294.03,-694.47 1356.95,-757.38 1546.95,-757.38 1648.63,-859.06 U1.82@1766.68,-859.06
  Bottom Layer w10: v1(169.99,-396.38) 169.99,-376.38 207.99,-338.38 377.95,-338.38 559.95,-520.38 1243.99,-520.38 1294.03,-570.42 v1(1294.03,-646.38)
Encoder_B_4+: P15.3 P24.5 U13.14 | length 1477.4
  Top Layer w10: P15.3@-40.01,-576.38 -40.01,-606.38 -65.01,-631.38 -510.01,-631.38 -523.43,-617.96 P24.5@-523.43,-576.38 -523.43,-554.81 -325.01,-356.38 199.99,-356.38 219.99,-376.38 U13.14@219.99,-427.38
Encoder_B_4-: P24.6 R112.2 U13.15 | length 1104.6
  Top Layer w10: P24.6@-572.65,-576.38 -572.65,-549.02 -355.01,-331.38 199.99,-331.38 269.99,-401.38 U13.15@269.99,-427.38
  Bottom Layer w10: R112.2@-575.01,-664.88 -575.01,-578.74 P24.6@-572.65,-576.38
GND: C1.2 C1_1.1 C2.1 C2_1.1 C3.1 C3_1.1 C8.2 C9.1 C9_1.1 C10.1 C11.1 C11_1.1 C12.1 C12_1.1 C13.1 C14.1 C15.1 C16.2 C17.1 C18.1 C38.2 C41.2 C42.2 C43.2 C44.2 C45.2 C46.1 C47.1 C48.1 C53.1 C54.2 C55.2 C56.1 C57.1 C58.1 C59.1 C60.1 C65.1 C66.2 C67.2 C68.1 C69.1 C70.1 C71.1 C72.1 C77.1 C78.2 C79.2 C80.1 C81.1 C82.1 C83.1 C84.1 C85.2 C90.1 C91.2 C92.2 C93.1 C95.2 C96.2 C97.2 C98.2 C99.1 C103.2 C104.2 C107.2 C108.2 C109.2 C110.2 C111.2 C112.2 header1*6pin.6 J10.2 J.1 JP1.2 JP5.1 JP5.3 JP5.5 JP6.6 NICERF2401F27.2 NICERF2401F27.11 NICERF2401F27.14 P1.1 P1_1.6 P2.1 P2_1.1 P3.1 P4.1 P5.1 P6.1 P7.1 P8.5 P10.6 P11.1 P12.6 P13.1 P14.6 P15.1 P16.5 P17.5 P18.5 P19.5 P20.5 P21.1 P22.1 P23.1 P24.1 P25.1 Q1.2 Q2.2 R1_1.1 R3.2 R3_1.1 R5_1.1 R6_1.1 R7.2 R45.1 R46.1 R47.1 R58.1 R59.1 R60.1 R61.1 R62.1 R64.1 R66.1 R67.1 R68.1 R70.1 R72.1 R73.1 R74.1 R76.1 R78.1 R79.1 R80.1 R82.1 R84.1 R85.1 R89.1 R94.1 R101.2 U1.16 U1.31 U1.38 U1.51 U1.61 U1.83 U1.94 U1.107 U1.120 U1.130 U1_1.17 U1_1.21 U1_1.41 U2.12 U3.2 U3.3 U4.3 U6.8 U11.2 U11.7 U11.8 U11.9 U11.10 U11.15 U12.1 U13.8 U14.2 U14.7 U14.8 U14.9 U14.10 U14.15 U15.17 U15.21 U15.41 U16.2 U16.7 U16.8 U16.9 U16.10 U16.15 U17.17 U17.21 U17.41 U18.8 U19.2 U19.7 U19.8 U19.9 U19.10 U19.15 U20.17 U20.21 U20.41 U21.2 U21.7 U21.8 U21.9 U21.10 U21.15 U22.17 U22.21 U22.41 U23.5 U25.5 U25.10 U25.15 U25.17 U26.1 U26.2 U26.4 U26.5 U26.8 X2.2 X2.4 | length 11660.5
  Top Layer w10: P5.1@-397.01,-1755.98 P5.1@-397.01,-1737.38 ; v1(254.99,-1701.38) NICERF2401F27.11@254.99,-1596.38 ; NICERF2401F27.14@326.65,-2834.18 v1(326.65,-2734.73) ; C1_1.1@438.49,-156.38 v3@438.49,-66.38 ; U1_1.41@609.64,-178.74 v1(662.35,-178.74) ; v3@699.99,-1286.38 694.99,-1291.38 748.49,-1291.38 C70.1@817.49,-1360.38 ; v1(704.99,-1726.38) NICERF2401F27.2@704.99,-1596.38 ; v1(729.99,-871.38) 748.82,-890.21 749.72,-890.21 776.05,-916.54 825.15,-916.54 ; U20.21@826.41,-851.03 825.15,-852.29 825.15,-916.54 ; U20.41@846.09,-1181.74 v1(846.09,-1132.48) ; v1(874.99,-664.88) R74.1@937.49,-664.88 C72.1@999.99,-664.88 ; U20.17@905.15,-851.03 905.15,-901.22 889.83,-916.54 825.15,-916.54 ; C8.2@929.99,-1691.38 v1(979.99,-1691.38) ; v1(934.99,-46.38) 901.17,-80.21 901.17,-81.83 879.99,-103 879.99,-171.38 ; U1_1.21@940.35,-159.06 892.31,-159.06 879.99,-171.38 ; C3_1.1@1111.49,-331.38 R1_1.1@1111.49,-271.38 1111.49,-242.63 ; R3_1.1@1111.49,-213.88 1111.49,-242.63 ; U11.2@1207.49,-563.88 1230.96,-563.88 1244.99,-577.91 v1(1244.99,-689.95) ; U19.2@1227.49,-948.88 1229.99,-951.38 v1(1279.99,-951.38) 1429.99,-951.38 U19.15@1432.49,-948.88 ; U11.8@1227.49,-713.88 1244.99,-696.38 v1(1244.99,-689.95) ; U11.7@1227.49,-688.88 1228.56,-689.95 v1(1244.99,-689.95) ; U19.8@1232.45,-1099.57 v1(1232.45,-1086.97) U19.7@1232.45,-1074.37 ; v1(1314.99,-2401.38) U25.5@1399.99,-2401.38 ; v1(1374.99,448.62) U4.3@1374.99,556.26 ; v1(1412.49,-713.88) 1387.49,-713.88 1364.99,-691.38 ; U11.10@1412.49,-688.88 1367.49,-688.88 1364.99,-691.38 ; U11.15@1412.49,-563.88 1377.49,-563.88 1364.99,-576.38 1364.99,-691.38 ; U19.9@1427.53,-1099.57 v1(1427.53,-1086.97) U19.10@1427.53,-1074.37 ; C79.2@1484.99,-326.38 1489.99,-331.38 v1(1654.99,-331.38) ; U1.107@1766.68,-1351.19 1825.19,-1351.19 v1(1844.99,-1331.38) ; U1.94@1766.68,-1095.28 1912.89,-1095.28 v1(1943.99,-1126.38) ; U1.83@1766.68,-878.74 1907.35,-878.74 1924.99,-896.38 v1(1944.99,-896.38) ; U25.17@1899.99,-1801.38 v1(1899.99,-1731.38) ; v1(1999.99,-2681.38) U25.10@1999.99,-2601.38 ; v1(2034.99,-786.38) 2057.04,-764.34 U1.61@2057.04,-608.08 ; U1.120@2057.04,-1444.69 2057.04,-1319.34 v1(2079.99,-1296.38) ; U25.15@2199.99,-2001.38 v1(2274.99,-2001.38) ; v1(2244.99,-676.38) 2253.89,-667.48 U1.51@2253.89,-608.08 ; U1.130@2253.89,-1444.69 2252.99,-1443.79 2252.99,-1298.38 v1(2274.99,-1276.38) ; U21.15@2357.49,-438.88 2380.96,-438.88 2409.99,-409.85 v1(2409.99,-406.38) ; U21.10@2357.49,-313.88 U21.9@2357.49,-288.88 ; C90.1@2414.99,-39.88 v1(2414.99,-4.63) R89.1@2414.99,30.62 ; v1(2429.99,-1051.38) 2454.2,-1075.59 U1.16@2603.3,-1075.59 ; U1.38@2509.8,-608.08 2509.8,-656.19 v1(2524.99,-671.38) ; v1(2509.99,-316.38) 2512.49,-313.88 U21.7@2562.49,-313.88 U21.8@2562.49,-288.88 ; v1(2514.99,-406.38) 2514.99,-421.38 2532.49,-438.88 U21.2@2562.49,-438.88 ; U1.31@2603.3,-780.32 2646.06,-780.32 v1(2664.99,-761.38) ; U22.41@2659.64,-167.24 v1(2707.63,-167.24) ; P8.5@2759.99,618.62 2759.99,918.62 P16.5@2764.99,923.62 ; X2.4@2766.68,-874.22 2766.68,-815.16 X2.2@2853.3,-728.55 X2.2@2859.46,-722.38 ; C95.2@2884.99,-1262.38 2918.49,-1228.88 2923.49,-1228.88 ; C96.2@2884.99,-1190.38 2923.49,-1228.88 ; v1(2918.99,-651.38) 2918.99,-662.85 X2.2@2859.46,-722.38 ; v1(2924.99,-722.38) X2.2@2859.46,-722.38 ; U16.8@2972.49,-1023.88 U16.7@2997.49,-1023.88 ; U22.17@2990.35,-226.3 2946.41,-226.3 2933.57,-213.47 2933.57,-151.3 ; U22.21@2990.35,-147.56 2937.31,-147.56 2933.57,-151.3 ; v1(2994.99,-24.88) 2951.17,-68.71 2951.17,-70.33 2933.57,-87.92 2933.57,-151.3 ; U16.10@2997.49,-1228.88 U16.9@2972.49,-1228.88 v1(2939.99,-1228.88) 2923.49,-1228.88 ; U2.12@3050.99,-2097.13 3099.24,-2097.13 3119.99,-2076.38 3119.99,-2044.38 v1(3116.99,-2041.38) ; v1(3122.49,-1273.88) U16.15@3122.49,-1228.88 ; v1(3122.49,-1071.38) U16.2@3122.49,-1023.88 ; U26.8@3153.1,-1655.95 3210.43,-1655.95 3214.99,-1651.38 3214.99,-1551.38 ; U26.5@3153.1,-1579.18 U26.4@3153.1,-1553.59 3212.79,-1553.59 3214.99,-1551.38 ; U26.2@3153.1,-1502.41 U26.1@3153.1,-1476.82 3205.43,-1476.82 ; v1(3169.99,-394.88) 3201.49,-363.38 C84.1@3201.49,-329.88 R80.1@3201.49,-269.88 R82.1@3201.49,-209.88 ; v1(3254.56,-1476.82) 3205.43,-1476.82 ; v1(3294.99,-1351.38) R68.1@3354.99,-1351.38 C60.1@3417.49,-1351.38 R70.1@3479.99,-1351.38 ; C53.1@3294.99,-24.88 v1(3294.99,8.62) 3294.99,52.12 R59.1@3295.46,52.59 ; U14.15@3327.49,-453.88 v1(3389.99,-453.88) U14.2@3532.49,-453.88 ; U14.10@3327.49,-328.88 v1(3327.49,-316.38) U14.9@3327.49,-303.88 ; U17.17@3435.46,-1156.74 3435.46,-1110.91 3454.52,-1091.85 3500.46,-1091.85 ; v1(3494.52,-880.91) U17.41@3494.52,-826.03 ; U17.21@3514.2,-1156.74 3514.2,-1105.59 3500.46,-1091.85 ; U14.7@3532.49,-328.88 v1(3532.49,-316.38) U14.8@3532.49,-303.88 ; U15.41@3550.11,-137.33 v1@3604.99,-137.33 ; R60.1@3583.49,-621.38 3522.99,-621.38 C65.1@3517.99,-616.38 3517.99,-675.38 C58.1@3514.99,-678.38 3576.99,-678.38 v3(3599.99,-701.38) ; v1(3624.99,-1156.38) 3624.99,-1151.65 3565.2,-1091.85 3500.46,-1091.85 ; C17.1@3626.79,-1636.7 v1(3706.29,-1636.7) ; U3.2@3786.99,-1783.78 3820.34,-1783.78 U3.3@3857.74,-1746.38 ; C15.1@3865.49,-1539.07 v1(3944.99,-1539.07) ; v1(3875.46,-6.85) 3820.94,-61.38 3820.94,-131.38 ; U15.17@3880.82,-196.38 3834.99,-196.38 3820.94,-182.33 3820.94,-131.38 ; U15.21@3880.82,-117.64 3834.68,-117.64 3820.94,-131.38 ; R64.1@4068.46,-161.85 R62.1@4068.46,-219.35 4069.99,-276.38 v1(4069.99,-331.38) ; v1(4134.99,-2841.38) U6.8@4134.99,-2801.38 U6.8@4134.99,-2786.38 ; v1(4254.99,-1875.38) 4255.99,-1874.38 R7.2@4339.99,-1874.38 ; 879.99,-171.38 879.99,-226.38 891.41,-237.8 U1_1.17@940.35,-237.8 1015.45,-237.8 1019.03,-241.38 1110.24,-241.38 1111.49,-242.63 ; 3205.43,-1476.82 3214.99,-1486.38 3214.99,-1551.38
  Top Layer w40: R6_1.1@438.49,28.62 439.99,27.12 v3(439.99,-66.38) ; R79.1@629.99,-1296.38 639.99,-1286.38 699.99,-1286.38 v3(709.99,-1286.38) ; R85.1@2519.99,28.97 2519.99,-61.38 v3(2524.99,-66.38) ; v3(3389.99,-31.38) R67.1@3389.99,63.62 ; v3(3599.99,-701.38) R73.1@3645.35,-701.38
  Bottom Layer w10: R3.2@-156.01,873.62 v1(-163.01,873.62) -163.01,935.78 Q1.2@-152.41,946.37 ; P17.5@659.99,913.62 659.99,965.12 C11_1.1@678.49,983.62 ; v1(662.35,-178.74) 662.35,-277.24 C2_1.1@679.99,-294.88 ; v1(846.09,-1132.48) 910.89,-1132.48 C71.1@936.99,-1106.38 ; R5_1.1@864.99,-357.88 866.49,-356.38 v1(929.99,-356.38) ; R78.1@999.99,-926.38 999.99,-896.38 v1(1034.99,-861.38) ; J.1@1003.99,-2402.38 J.1@1004.99,-2401.38 ; C16.2@1299.99,1177.62 1365.99,1243.62 C112.2@1399.99,1243.62 ; R46.1@1324.99,453.62 1329.99,448.62 v1(1374.99,448.62) 1419.99,448.62 R47.1@1424.99,453.62 ; v1(1654.99,-331.38) 1690.99,-331.38 C13.1@1755.99,-396.38 ; v1(1839.99,-796.38) 1840.99,-795.38 C12.1@1914.99,-795.38 ; v1(1943.99,-1126.38) 1943.99,-1115.38 1948.99,-1120.38 C42.2@1948.99,-1131.38 ; v1(1944.99,-896.38) 1944.99,-897.38 1948.99,-901.38 C41.2@1963.99,-901.38 ; v1(2274.99,-1276.38) 2279.99,-1271.38 R101.2@2354.99,-1271.38 2429.99,-1271.38 v1(2439.99,-1281.38) C55.2@2439.99,-1356.38 ; v1(2707.63,-167.24) 2707.63,-224.19 C83.1@2738.33,-254.88 ; R84.1@2913.33,-317.88 2937.99,-317.88 v1(2974.99,-354.88) ; v1(3319.99,-1156.38) 3319.99,-1131.38 3338.49,-1112.88 R72.1@3338.49,-1081.38 ; C59.1@3401.49,-896.38 3409.99,-896.38 3425.46,-880.91 v1(3494.52,-880.91) ; v1(3605.46,-136.85) 3605.46,-196.85 3625.46,-216.85 C47.1@3625.46,-230.35 ; R66.1@3800.46,-293.35 3846.96,-293.35 3870.46,-316.85 v1(3875.46,-316.85) ; C1.2@4439.99,1043.62 4485.78,1089.41 JP1.2@4485.78,1128.62 ; C81.1@4904.99,-2.88 4904.99,-36.38 4911.84,-43.23 P11.1@4979.99,-43.23
  Bottom Layer w20: C57.1@-320.01,-1157.88 -291.51,-1186.38 P20.5@-255.01,-1186.38 ; P18.5@3819.99,918.62 3819.99,975.12 C12_1.1@3843.49,998.62 ; P6.1@4769.99,-1768.98 P6.1@4787.99,-1750.98
  other v1: 1715.99,-3340.08 2280.99,-3340.08 2934.99,-3071.08 3554.99,-3067.08 4499.99,-2651.38 -20,-2383 809.99,-2308.38 4501.82,-1863.22 3834.99,-1746.38 626.49,-1376.38 1546.99,-1351.38 4779.99,-1189.88 2974.99,-1046.38 2429.99,-756.38 5004.99,-734.88 4489.99,-637.38 1759.99,-476.38 2379.99,-291.38 -30.01,-166.38 2489.99,-136.38 1394.99,-126.38 3373.96,-111.85 1714.99,-26.38 1754.99,-26.38 1794.99,-26.38 1834.99,-26.38 324.99,-17.88 -378.51,393.62 -430.01,638.62 -265.01,763.62 -265.01,798.62 -265.01,838.62 -265.01,873.62 30.99,953.62 3051.49,1153.62
  other v2: -393,-1830 4792,-1825 -438,-1815 -348,-1815 4747,-1810 4837,-1810 -463,-1785 -318,-1785 4722,-1780 4867,-1780 -478,-1745 -308,-1745 4707,-1740 4877,-1740 -463,-1705 -323,-1705 4722,-1700 4862,-1700 -433,-1675 -353,-1675 4752,-1670 4832,-1670 -393,-1660 4792,-1655 4932,-334 -533,-330 4887,-319 4977,-319 -578,-315 -488,-315 4862,-289 5007,-289 -603,-285 -458,-285 4847,-249 5017,-249 -618,-245 -448,-245 4862,-209 5002,-209 -603,-205 -463,-205 4892,-179 4972,-179 -573,-175 -493,-175 4932,-164 -533,-160
H1_1: P1_1.1 P17.6 U1_1.10 | length 2526.8
  Top Layer w10: P17.6@559.99,913.62 559.99,968.62 619.99,1028.62 1044.99,1028.62 1184.99,888.62 1184.99,553.62 ; U1_1.10@843.89,-373.63 843.89,-421.38 865.89,-443.38 962.99,-443.38 v1(964.99,-441.38) ; P1_1.1@1069.99,603.62 1134.99,603.62 1184.99,553.62 ; v1(1184.99,328.62) 1184.99,553.62
  Bottom Layer w10: v1(964.99,-441.38) 1013.28,-441.38 1134.99,-319.67 1134.99,33.62 1184.99,83.62 v1(1184.99,328.62)
H1_2: P10.1 P18.6 U15.10 | length 2359
  Top Layer w10: P18.6@3719.99,918.62 3804.99,1003.62 4234.99,1003.62 4289.99,948.62 4289.99,678.62 P10.1@4234.99,623.62 4179.99,568.62 v1(4179.99,468.62) ; U15.10@3784.36,-332.21 3784.36,-379.79 3816.42,-411.85 v1(3895.46,-411.85)
  Bottom Layer w10: v1(3895.46,-411.85) 3955.46,-411.85 4090.46,-276.85 4090.46,63.15 4179.99,152.67 v1(4179.99,468.62)
H1_3: P12.1 P19.6 U17.10 | length 2429.1
  Top Layer w10: v1(3214.99,-1161.38) 3214.99,-1091.38 3246.09,-1060.28 U17.10@3299.64,-1060.28 ; v1(3809.99,-1461.38) 4164.99,-1461.38 P12.1@4239.99,-1536.38 4239.99,-1576.38 4274.99,-1611.38 4574.99,-1611.38 4659.99,-1526.38 4659.99,-1141.38 4574.99,-1056.38 P19.6@4534.99,-1056.38
  Bottom Layer w10: v1(3214.99,-1161.38) 3214.99,-1206.38 3379.99,-1371.38 3699.99,-1371.38 3789.99,-1461.38 v1(3809.99,-1461.38)
H1_4: P14.1 P20.6 U20.10 | length 2594
  Top Layer w10: P20.6@-255.01,-1286.38 -355.01,-1186.38 -355.01,-786.38 -285.01,-716.38 59.99,-716.38 ; P14.1@59.99,-781.38 59.99,-716.38 ; v1(269.99,-501.38) 219.99,-501.38 59.99,-661.38 59.99,-716.38 ; U20.10@1040.98,-947.48 1097.93,-947.48 1129.99,-915.42 v1(1129.99,-901.38)
  Bottom Layer w10: v1(269.99,-501.38) 355.15,-501.38 409.15,-555.38 558.19,-555.38 605.19,-602.38 950.99,-602.38 1129.99,-781.38 v1(1129.99,-901.38)